# Altium PCB Drone_v1.0.PcbDoc
Units mm, origin at the board's own origin, x right, y up, seen from the top; angles counter-clockwise.
Board outline 99.06 x 99.27 mm, 2 copper layers (Top Layer, Bottom Layer); 71 components, 51 nets, 228 pads, 49 vias.
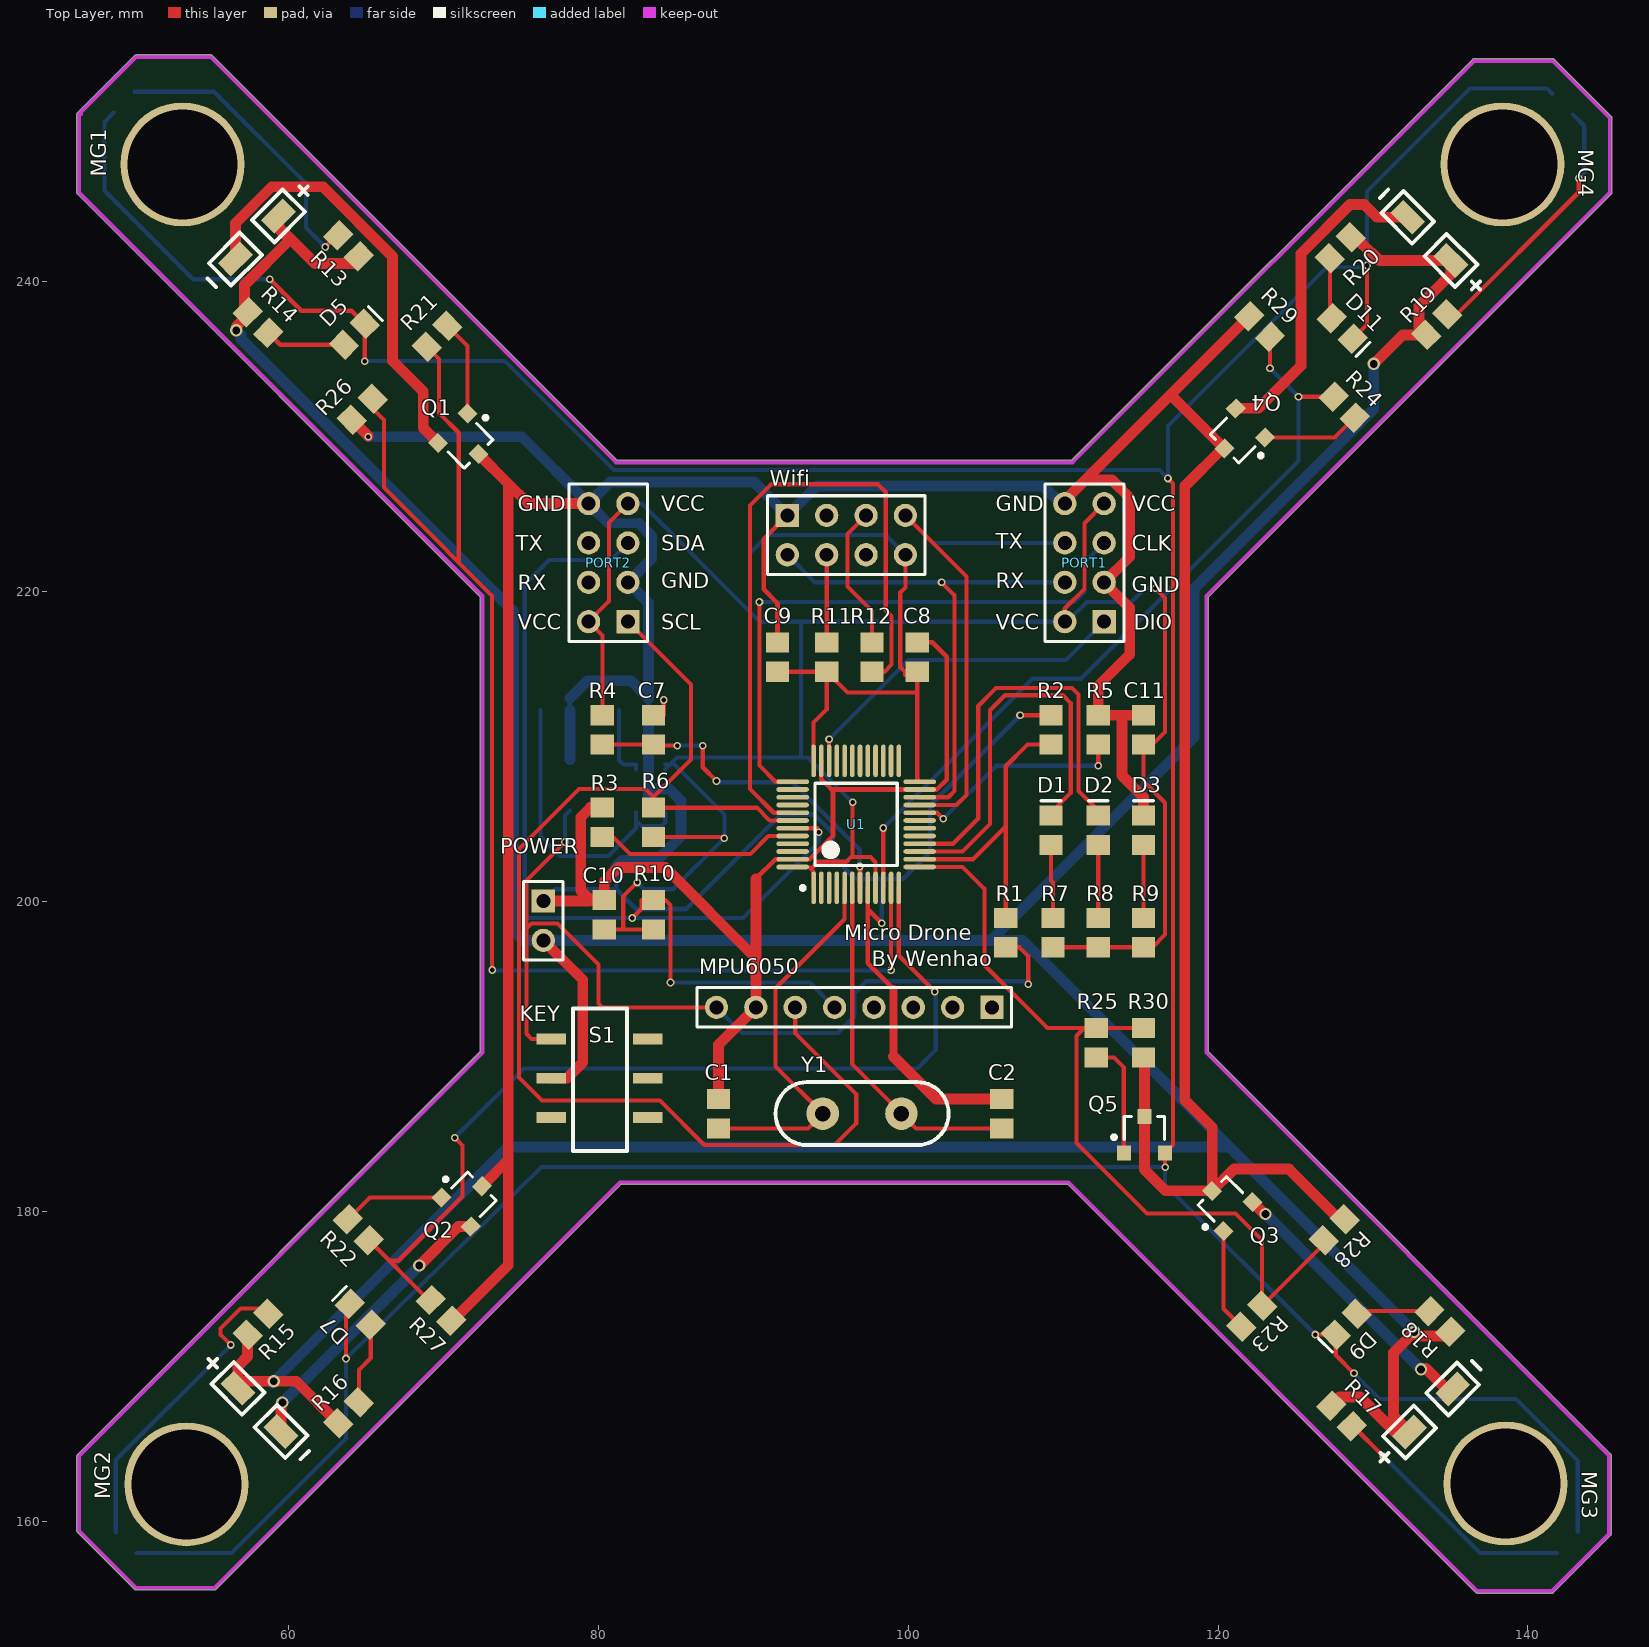
[diagram p0: Top Layer view]
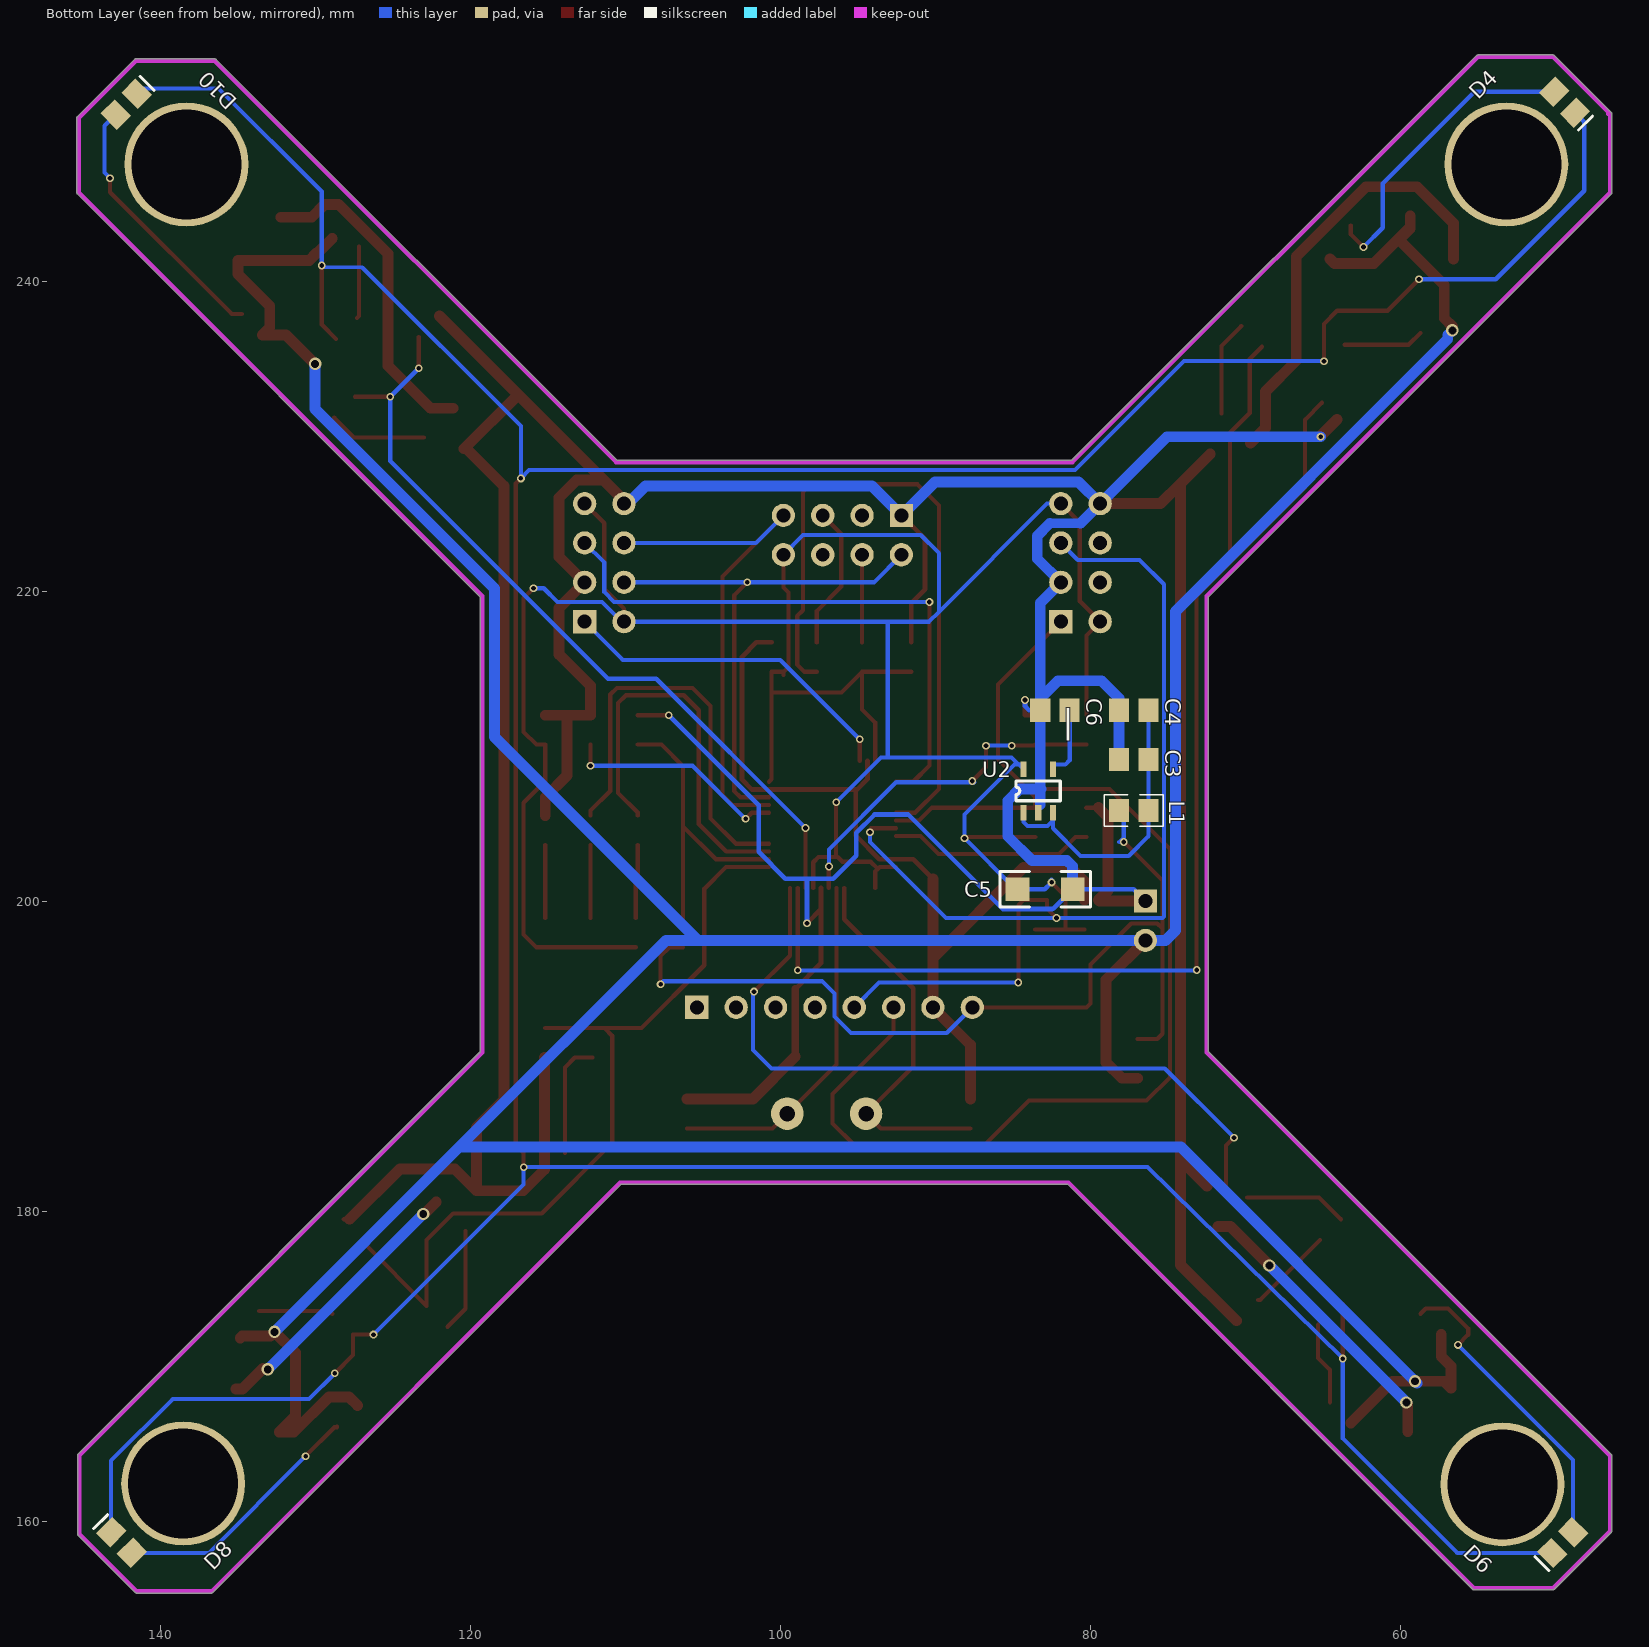
[diagram p1: Bottom Layer view, seen from below]

## Layer stack, top to bottom
Top Layer: signal copper 0.0356
Dielectric: dielectric 0.32, FR-4, Dk 4.8
Bottom Layer: signal copper 0.0356

## Board outline
50.075,155.612 46.392,159.295 46.392,159.294 cw(c46.482,159.385) 46.355,159.385 46.355,164.211 cw(c46.482,164.211) 46.392,164.302 46.392,164.301 72.39,190.299 72.39,219.657 46.392,245.655 46.392,245.654 cw(c46.482,245.745) 46.355,245.745 46.355,250.825 cw(c46.482,250.825) 46.392,250.916 46.392,250.915 50.075,254.598 50.074,254.598 cw(c50.165,254.508) 50.165,254.635 54.991,254.635 cw(c54.991,254.508) 55.082,254.598 55.081,254.598 81.206,228.473 110.564,228.473 136.435,254.344 136.434,254.344 cw(c136.525,254.254) 136.525,254.381 141.605,254.381 cw(c141.605,254.254) 141.696,254.344 141.695,254.344 145.378,250.661 145.378,250.662 cw(c145.288,250.571) 145.415,250.571 145.415,245.745 cw(c145.288,245.745) 145.378,245.654 145.378,245.655 119.38,219.657 119.38,190.299 145.332,164.347 145.331,164.348 cw(c145.242,164.257) 145.369,164.257 145.369,159.177 cw(c145.242,159.177) 145.331,159.087 145.332,159.087 141.649,155.404 141.649,155.405 cw(c141.559,155.494) 141.559,155.367 136.733,155.367 cw(c136.733,155.494) 136.635,155.413 cw(c136.716,155.512) 136.625,155.421 110.31,181.737 81.46,181.737 55.335,155.612 55.336,155.612 cw(c55.245,155.702) 55.245,155.575 50.165,155.575 cw(c50.165,155.702)

## Design rules (kind name [scope] priority, off if disabled: settings)
Clearance [All] p1: gap=0.2
PolygonConnect [All] p1: connectstyle=Relief reliefconductorwidth=0.254 reliefentries=4 polygonreliefangle="90 Angle" airgapwidth=0.254
RoutingVias [All] p1: holewidth=0.3 width=0.5 viastyle="Through Hole" minholewidth=0.3 minwidth=0.5 maxholewidth=0.3 maxwidth=0.5
SolderMaskExpansion [All] p1: expansion=0.102
Width [All] p1: maxlimit=0.8 minlimit=0.27 preferedwidth=0.27 minimp=50.000000 maximp=50.000000 favimp=50.000000
28 further rules are at their usual default settings.

## Components (designator, comment, footprint, x,y, rotation, side; value= is the part's Value field where it differs from the comment)
C1 "0402 12pF" 0805-2 87.757,186.309 r90 top
C2 "0402 12pF" 0805-2 106.045,186.309 r270 top
C3 "0402 12pF" 0805-2 77.216,209.169 r0 bottom
C4 "0402 12pF" 0805-2 77.216,212.344 r0 bottom
C5 "Cap Pol" 1206 82.931,200.787 r180 bottom
C6 "0402 12pF" 0805-2 82.296,212.344 r0 bottom
C7 "Cap" 0805-2 83.566,211.074 r90 top
C8 "Cap" 0805-2 100.584,215.773 r270 top
C9 "Cap" 0805-2 91.567,215.773 r270 top
C10 "Cap" 0805-2 80.391,199.136 r270 top
C11 "Cap" 0805-2 115.189,211.074 r270 top
D1 "LED0" LED_0805 109.22,204.597 r90 top
D2 "LED0" LED_0805 112.268,204.597 r90 top
D3 "LED0" LED_0805 115.189,204.597 r90 top
D4 "LED0" LED_0805 49.403,251.587 r225 bottom
D5 "LED0" LED_0805 64.262,236.601 r45 top
D6 "LED0" LED_0805 49.53,158.623 r315 bottom
D7 "LED0" LED_0805 64.643,173.355 r135 top
D8 "LED0" LED_0805 142.538,158.633 r45 bottom
D9 "LED0" LED_0805 128.27,172.72 r225 top
D10 "LED0" LED_0805 142.24,251.46 r135 bottom
D11 "LED0" LED_0805 128.016,236.982 r315 top
L1 "Inductor" 0805-1 77.216,205.867 r180 bottom
MG1 "MOTOR AC" Motor 53.975,246.761 r315 top
MG2 "MOTOR AC" Motor 54.229,163.195 r45 top
MG3 "MOTOR AC" Motor 137.749,163.241 r135 top
MG4 "MOTOR AC" Motor 137.541,246.761 r225 top
MPU6050 "MPU6050" HDR1X8 105.41,193.167 r180 top (schematic designator P1)
PORT1 "PORT" HDR2X4_CEN 112.649,218.059 r90 top
PORT2 "PORT" HDR2X4_CEN 81.915,218.059 r90 top
POWER "Header 2" HDR1X2 76.454,200.025 r270 top (schematic designator POWER1)
Q1 "MOSN" PCBComponent_1#1 71.374,229.87 r225 top
Q2 "MOSN" PCBComponent_1#1 71.501,180.721 r315 top
Q3 "MOSN" PCBComponent_1#1 120.523,180.34 r45 top
Q4 "MOSN" PCBComponent_1#1 121.412,230.124 r135 top
Q5 "MOSN" PCBComponent_1#1 115.189,184.785 r0 top
R1 "Res1" 0805-2 106.299,197.993 r270 top
R2 "Res1" 0805-2 109.22,211.074 r90 top
R3 "Res1" 0805-2 80.264,205.105 r270 top
R4 "Res1" 0805-2 80.264,211.074 r90 top
R5 "Res1" 0805-2 112.268,211.074 r270 top
R6 "Res1" 0805-2 83.566,205.105 r90 top
R7 "Res1" 0805-2 109.347,197.993 r270 top
R8 "Res1" 0805-2 112.268,197.993 r270 top
R9 "Res1" 0805-2 115.189,197.993 r270 top
R10 "Res1" 0805-2 83.566,199.136 r90 top
R11 "Res1" 0805-2 94.742,215.773 r270 top
R12 "Res1" 0805-2 97.663,215.773 r90 top
R13 "Res1" 0805-2 63.881,242.316 r135 top
R14 "Res1" 0805-2 58.039,237.363 r315 top
R15 "Res1" 0805-2 58.039,172.72 r45 top
R16 "Res1" 0805-2 63.881,167.005 r45 top
R17 "Res1" 0805-2 127.97,166.797 r315 top
R18 "Res1" 0805-2 134.32,172.893 r135 top
R19 "Res1" 0805-2 134.112,237.236 r45 top
R20 "Res1" 0805-2 127.889,242.189 r225 top
R21 "Res1" 0805-2 69.596,236.474 r225 top
R22 "Res1" 0805-2 64.516,178.816 r315 top
R23 "Res1" 0805-2 122.174,173.228 r45 top
R24 "Res1" 0805-2 128.143,231.902 r135 top
R25 "Res1" 0805-2 112.141,190.881 r90 top
R26 "Res1" 0805-2 64.77,231.775 r45 top
R27 "Res1" 0805-2 69.85,173.609 r135 top
R28 "Res1" 0805-2 127.508,178.816 r225 top
R29 "Res1" 0805-2 122.682,237.109 r315 top
R30 "Res1" 0805-2 115.189,190.881 r90 top
S1 "Switch" 开关 78.359,183.896 r0 top
U1 "STM32F103C" LQFP-48_M 96.647,204.978 r90 top
U2 "MIC5219" SOT25-5 84.328,205.74 r90 bottom
Wifi "ESP03" PCBComponent_1#2 92.202,222.377 r0 top (schematic designator Header1)
Y1 "Micro 3215" XTAL5 94.488,186.309 r0 top

## Footprints (in the part's own frame and the unit in brackets; to place one, negate y for a bottom-side part, rotate by r counter-clockwise, add the part's x,y. Pads: shape width x height; smd on the part's side, far side on the other; paste and mask are expansions set on the pad)
0805-1 [mm] "贴片带丝印"
  rect 1.3x1.5 smd: 1(-0.95,0) 2(0.95,0)
  silkscreen extent -1.91,-1.02 1.91,1.02, body extent -1.14,-0.51 1.14,0.51, height 1
0805-2 [mm] "贴片无丝印"
  rect 1.3x1.5 smd: 1(-0.95,0) 2(0.95,0)
1206 [mil] "贴片元件"
  rect 60x60 smd: 1(-70,0) 2(70,0)
  silkscreen extent -115,-45 115,45, body extent -75,-35 75,35, height 39
HDR1X2 [mm] "Connector; Header; 2 Position"
  rect 1.5x1.5 hole 0.9: 1(0,0)
  round 1.5 hole 0.9: 2(2.54,0)
  silkscreen extent -1.27,-1.27 3.81,1.27
HDR1X8 [mm] "Connector; Header; 8 Position"
  rect 1.5x1.5 hole 0.9: 1(0,0)
  round 1.5 hole 0.9: 2(2.54,0) 3(5.08,0) 4(7.62,0) 5(10.16,0) 6(12.7,0) 7(15.24,0) 8(17.78,0)
  silkscreen extent -1.27,-1.27 19.05,1.27
HDR2X4_CEN [mm] "Connector; Header; 4x2 Position"
  rect 1.5x1.5 hole 0.9: 1(0,0)
  round 1.5 hole 0.9: 2(2.54,0) 3(5.08,0) 4(7.62,0) 5(0,2.54) 6(2.54,2.54) 7(5.08,2.54) 8(7.62,2.54)
  silkscreen extent -1.27,-1.27 8.89,3.81
LED_0805 [mm] "贴片二极管"
  rect 1.3x1.5 smd: 1(-0.95,0) 2(0.95,0)
  silkscreen extent 1.91,-0.63 1.91,0.64
LQFP-48_M [mm] "Thin QFP, 48-Leads, Body 7x7mm, Pitch 0.5mm, IPC Low Density"
  oval 2.1x0.3 smd: 1(-4.1,2.75) 2(-4.1,2.25) 3(-4.1,1.75) 4(-4.1,1.25) 5(-4.1,0.75) 6(-4.1,0.25) 7(-4.1,-0.25) 8(-4.1,-0.75) 9(-4.1,-1.25) 10(-4.1,-1.75) 11(-4.1,-2.25) 12(-4.1,-2.75) 25(4.1,-2.75) 26(4.1,-2.25) 27(4.1,-1.75) 28(4.1,-1.25) 29(4.1,-0.75) 30(4.1,-0.25) 31(4.1,0.25) 32(4.1,0.75) 33(4.1,1.25) 34(4.1,1.75) 35(4.1,2.25) 36(4.1,2.75)
  oval 0.3x2.1 smd: 13(-2.75,-4.1) 14(-2.25,-4.1) 15(-1.75,-4.1) 16(-1.25,-4.1) 17(-0.75,-4.1) 18(-0.25,-4.1) 19(0.25,-4.1) 20(0.75,-4.1) 21(1.25,-4.1) 22(1.75,-4.1) 23(2.25,-4.1) 24(2.75,-4.1) 37(2.75,4.1) 38(2.25,4.1) 39(1.75,4.1) 40(1.25,4.1) 41(0.75,4.1) 42(0.25,4.1) 43(-0.25,4.1) 44(-0.75,4.1) 45(-1.25,4.1) 46(-1.75,4.1) 47(-2.25,4.1) 48(-2.75,4.1)
  silkscreen extent -4.22,-2.65 2.65,3.57, body extent -3.5,-3.5 3.5,3.5, height 1.6
Motor [mm]
  round 8 hole 7.1: 0(-1.143,0)
  rect 1.2x2 smd: 1(5.588,2.032) 2(5.588,-1.905)
  silkscreen extent 4.57,-4.06 6.6,4.7
PCBComponent_1#1 [mm]
  rect 0.9x0.95 smd: 1(-1.27,-1.016) 2(1.397,-1.016) 3(0.061,1.334)
  silkscreen extent -2.03,-0.14 1.36,1.33
PCBComponent_1#2 [mm]
  rect 1.5x1.5 hole 0.9: 1(0,2.54)
  round 1.5 hole 0.9: 2(2.54,2.54) 3(5.08,2.54) 4(7.62,2.54) 5(7.62,0) 6(5.08,0) 7(2.54,0) 8(0,0)
  silkscreen extent -1.27,-1.27 8.89,3.81
SOT25-5 [mm]
  rect 1x0.4 smd: 1(0,0) 2(0,-0.95) 3(0,-1.9) 4(2.8,-1.9) 5(2.8,0)
  silkscreen extent 0.76,-2.38 2.03,0.48
XTAL5 [mm]
  round 2.1 hole 1: 1(0,0) 2(5.08,0)
  silkscreen extent -3.05,-2.03 8.13,2.03
开关 [mm]
  rect 1.9x0.7 smd: 1(-1.397,7.239) 2(-1.397,4.699) 3(-1.397,2.159) 4(4.826,7.239) 5(4.826,4.699) 6(4.826,2.159)
  silkscreen extent 0,0 3.5,9.2

## Part data
C1 C2 C3 C4 C6: library part Cap, "Capacitor"
C5: "极性电解电容"
C7 C8 C9 C10 C11: "无极性电容"
D1 D2 D3 D4 D5 D6 D7 D8 D9 D10 D11: "发光二极管"
L1: "电感"
MPU6050: library part "Header 8", "Header, 8-Pin"
PORT1 PORT2: library part "Header 4X2A", "Header, 4-Pin, Dual row"
POWER: "Header, 2-Pin"
Q1 Q2 Q3 Q4 Q5: library part SI2302
R1 R2 R3 R4 R5 R6 R7 R8 R9 R10 R11 R12 R13 R14 R15 R16 R17 R18 R19 R20 R21 R22 R23 R24 R25 R26 R27 R28 R29 R30: "贴片电阻"
S1: library part 双刀双柄开关
U1: "STM32单片机48引脚"
Wifi: library part Hearder
Y1: library part XTAL, "Crystal Oscillator"

## Via types
v1: diameter 0.5, hole 0.3, Top Layer to Bottom Layer, 41 vias
v2: diameter 0.8, hole 0.5, Top Layer to Bottom Layer, 8 vias

## Nets (pads, with @x,y where several pads share a name; then routed paths per layer and width w, separated by ;. In a path a pad name is that pad's centre, name@x,y a point inside that pad or via, vN(x,y) a via of type N, cw(c..) or ccw(c..) an arc to the next point about the centre after c; other vN are vias at no path point)
3V3: C5.1 C8.2 C9.2 C10.2 C11.2 PORT1.4 PORT1.5 PORT2.4 PORT2.5 R4.2 R6.1 R7.2 R8.2 R9.2 R10.1 R11.2 U1.1 U1.9 U1.24 U1.36 U1.48 U2.5 Wifi.5 | length 199.9
  Top Layer w0.27: R4.2 80.264,217.17 PORT2.5 80.697,219.381 80.697,224.461 PORT2.4 ; C10.2 82.787,198.186 R10.1 ; 81.609,198.186 81.609,200.329 v1(82.512,201.231) ; R6.1 88.072,204.155 v1(88.138,204.089) ; C9.2 93.142,214.823 R11.2 ; U1.48 93.599,202.228 93.726,202.101 ; U1.1 93.897,201.93 93.726,202.101 ; U1.36 93.897,211.55 94.742,212.395 R11.2 ; v1(96.418,206.4) 96.418,202.87 ; U1.9 97.897,202.534 97.561,202.87 96.418,202.87 ; 99.807,214.615 99.807,214.823 ; Wifi.5 99.822,220.269 99.492,219.939 99.492,215.138 99.807,214.823 ; 100.584,213.487 96.078,213.487 R11.2 ; U1.24 100.584,207.891 C8.2 99.807,214.823 ; R7.2 R8.2 R9.2 115.763,197.043 116.586,197.866 116.586,206.375 115.189,207.772 C11.2 115.763,210.124 116.586,210.947 116.586,219.583 v1(115.951,220.218) ; PORT1.5 110.109,218.897 111.379,220.167 111.379,224.409 PORT1.4 ; 93.726,202.101 94.189,202.565 96.01,202.565 96.315,202.87 96.418,202.87
  Bottom Layer w0.27: PORT2.4 82.804,225.679 89.789,218.694 ; v1@82.512,201.426 v1(82.512,201.231) 82.956,200.787 C5.1 ; U2.5 85.09,209.302 85.09,209.296 93.091,209.296 ; U2.5@84.328,208.839 84.912,208.839 88.138,205.613 v1(88.138,204.089) C5.1@84.836,200.787 ; v1(96.418,206.4) 93.523,209.296 93.091,209.296 ; Wifi.5 98.552,223.647 90.957,223.647 89.789,222.479 89.789,218.694 ; v1(115.951,220.218) 115.291,220.218 114.402,219.329 111.531,219.329 110.261,218.059 PORT1.5 93.218,218.059 ; 89.789,218.694 90.424,218.059 93.218,218.059 ; 93.091,209.296 93.091,217.932 93.218,218.059
BAT: MG1.1 MG2.1 MG3.1 MG4.1 POWER.2 R13.1 R14.1 R15.1 R16.1 R17.1 R18.1 R19.1 R20.1 S1.2 | length 302.3
  Top Layer w0.7: v2(56.642,236.855) 56.642,237.109 57.171,237.638 57.171,239.797 60.085,242.711 59.363,243.434 MG1.1 59.363,243.532 61.722,241.173 64.262,241.173 R13.1@64.553,241.464 ; R15.1 57.367,170.626 56.743,170.002 MG2.1 57.197,169.037 60.506,169.037 R16.1 ; POWER.2 78.994,194.945 78.994,189.611 77.978,188.595 S1.2 ; R17.1 127.85,168.021 129.154,168.021 131.42,165.756 MG3.1 131.318,166.798 131.318,170.875 v2(132.664,172.221) 132.928,171.958 134.747,171.958 R18.1@134.874,171.831 ; R20.1@128.942,242.787 129.883,241.846 129.948,241.846 130.421,241.373 MG4.1 135.027,240.487 132.969,238.43 132.969,237.036 R19.1 131.916,236.564 v2(130.048,234.696)
  Bottom Layer w0.7: v2(56.642,236.855) 56.947,236.55 56.947,236.296 74.524,218.719 74.524,198.12 75.159,197.485 POWER.2 105.334,197.485 ; v2@58.928,168.91 74.168,184.15 120.736,184.15 ; v2(130.048,234.696) 130.048,231.775 118.466,220.193 118.466,210.617 105.334,197.485 ; v2(132.664,172.221) 120.736,184.15 ; 105.334,197.485 107.401,197.485 120.736,184.15
  other v2: 59.055,169.037
GND: C1.2 C2.1 C3.2 C4.2 C5.2 C6.2 C7.2 C8.1 C9.1 C10.1 C11.1 D3.2 MPU6050.7 PORT1.2 PORT1.8 PORT2.2 PORT2.8 POWER.1 Q1.3 Q2.3 Q3.3 Q4.3 Q5.3 R2.2 R3.1 R5.1 R26.1 R27.1 R28.1 R29.1 R30.1 U1.8 U1.23 U1.35 U1.47 U2.2 Wifi.1 | length 435.3
  Top Layer w0.27: U1.47 93.635,202.728 95.148,204.241
  Top Layer w0.3: v1@65.024,229.997 v1(65.151,229.997) v1@65.151,230.051 ; R27.1 R27.1@70.587,172.937 ; Q2.3@72.466,181.621 Q2.3 ; 79.487,206.055 R3.1 ; C7.2 84.226,212.024 v1(84.226,213.004) ; 90.17,201.458 91.44,202.728 U1.47 ; C9.1 91.567,219.253 90.678,220.142 90.678,223.393 Wifi.1 ; U1.35 94.397,207.888 95.057,207.228 ; 95.148,204.241 95.148,207.137 95.057,207.228 ; U1.8 97.397,199.492 ; v1(98.298,198.591) 97.397,199.492 ; 99.06,194.349 97.397,196.012 97.397,199.492 ; C8.1 101.563,216.723 102.489,215.797 102.489,207.863 101.854,207.228 U1.23 95.057,207.228 ; v1(107.224,212.024) R2.2 ; 117.856,226.822 117.867,226.822 ; R28.1@127.815,179.488 R28.1
  Top Layer w0.5: 99.06,189.992 99.06,194.349
  Top Layer w0.7: R26.1 v1@65.151,230.051 ; R27.1@70.587,172.937 74.193,176.544 74.193,183.327 ; Q1.3 74.193,226.964 ; Q2.3 74.193,183.327 ; POWER.1 79.431,200.025 ; PORT2.8 75.479,225.679 74.193,226.964 ; 79.487,206.055 78.867,205.435 78.867,200.711 79.492,200.086 ; C10.1 80.391,201.295 81.28,202.184 84.328,202.184 90.17,196.342 ; C1.2 87.757,190.754 MPU6050.7 90.17,201.458 ; 99.06,189.992 101.793,187.259 C2.1 ; PORT1.8 110.109,225.879 R29.1 ; 111.633,227.203 113.157,227.203 114.3,226.06 114.3,222.25 PORT1.2 114.3,218.948 114.3,215.951 112.268,213.919 R5.1 113.716,212.024 C11.1 ; 113.792,212.024 113.792,208.128 115.189,206.731 D3.2 ; R30.1@115.25,189.931 Q5.3 115.25,182.692 116.616,181.326 Q3.3 ; 116.985,232.664 Q4.3 ; 117.856,226.822 117.856,187.187 119.623,185.42 Q3.3 ; 117.867,226.822 Q4.3@120.269,229.224 ; R28.1@127.815,179.488 124.569,182.735 121.031,182.735 Q3.3 ; 74.193,183.327 74.193,226.964
  Bottom Layer w0.3: POWER.1 77.216,200.787 C5.2 ; C4.2 78.166,213.116 ; 81.153,201.574 C5.2 ; 83.246,213.106 C6.2 83.972,212.344 84.226,212.598 v1(84.226,213.004) ; v1(98.298,198.591) 98.298,201.473 ; v1(107.224,212.024) 101.422,206.223 101.422,203.2 99.695,201.473 98.298,201.473 ; PORT1.8@109.855,225.679 PORT1.8 ; C5.2 82.407,199.533 82.443,199.533 82.459,199.517 85.674,199.517 91.77,205.613 93.94,205.613 95.123,204.43 95.123,202.946 96.596,201.473 98.298,201.473
  Bottom Layer w0.6: 80.645,224.409 82.626,224.409
  Bottom Layer w0.7: v1(65.151,229.997) 75.057,229.997 PORT2.8 ; C3.2 C4.2 ; 78.166,213.116 79.299,214.249 82.103,214.249 83.246,213.106 83.246,219.268 PORT2.2 83.439,222.123 83.439,223.596 82.626,224.409 ; 80.645,224.409 PORT2.8 ; 81.152,201.574 81.152,202.271 81.534,202.653 83.781,202.653 85.344,204.216 85.344,206.502 84.582,207.264 83.185,207.264 ; 83.246,206.248 C6.2 ; PORT1.8@109.855,225.679 108.712,226.822 94.107,226.822 Wifi.1 90.043,227.076 80.772,227.076 PORT2.8
KEY: R12.1 U1.41 | length 44
  Top Layer w0.27: U1.41 91.325,205.728 89.789,207.264 89.789,225.552 91.161,226.924 98.044,226.924 98.552,226.416 98.552,218.796 98.933,218.415 98.933,215.29 98.466,214.823 R12.1
LED1: D1.2 U1.15 | length 26.2
  Top Layer w0.27: U1.15 103.508,203.228 105.283,205.003 105.283,212.344 106.251,213.312 109.982,213.312 110.49,212.804 110.49,207.01 109.22,205.74 D1.2
LED2: D2.2 U1.16 | length 27.2
  Top Layer w0.27: U1.16 102.89,203.728 104.521,205.359 104.521,212.623 105.679,213.782 110.569,213.782 110.998,213.353 110.998,207.137 112.268,205.867 D2.2
LED_EN: U1.45
NetC3_1: C3.1 C4.1 L1.2 U2.1 U2.3 | length 19.6
  Bottom Layer w0.27: C4.1 C3.1 L1.2 76.266,204.216 77.536,202.946 80.645,202.946 82.428,204.729 U2.3@82.428,205.461 ; U2.3 U2.3@82.428,205.461 ; U2.1 84.328,205.13 84.074,204.876 82.784,204.876 82.428,205.232 U2.3@82.428,205.461
NetC6_1: C6.1 U2.4 | length 4.7
  Bottom Layer w0.27: C6.1 81.346,209.118 81.625,208.839 82.428,208.839 U2.4
NetD1_1: D1.1 R7.1 | length 4.8
  Top Layer w0.27: D1.1 109.22,201.346 109.347,201.219 R7.1
NetD2_1: D2.1 R8.1 | length 4.7
  Top Layer w0.27: R8.1 D2.1
NetD3_1: D3.1 R9.1 | length 4.7
  Top Layer w0.27: R9.1 D3.1
NetD4_1: D4.1 R13.2 | length 19.8
  Top Layer w0.27: v1(62.382,242.24) 63.209,243.067 R13.2@63.209,243.623
  Bottom Layer w0.27: D4.1 55.208,252.259 61.138,246.329 61.138,243.484 v1(62.382,242.24)
NetD4_2: D4.2 D5.2 D6.2 D7.2 D8.2 D9.2 D10.2 D11.2 Q5.2 | length 296.7
  Top Layer w0.27: v1(58.801,240.157) 60.833,238.125 64.082,238.125 D5.2 v1(64.934,234.874) ; v1(63.717,170.499) D7.2@63.717,174.027 ; v1(116.586,182.855) Q5.2 117.094,184.277 117.094,226.974 v1(116.764,227.305) ; v1(126.275,172.048) D9.2 127.598,170.725 v1(128.778,169.545) ; D11.2 129.616,237.239 v1(129.616,241.046)
  Bottom Layer w0.27: D4.2 48.133,250.317 48.133,245.872 53.848,240.157 v1(58.801,240.157) ; D6.2 56.326,157.951 63.717,165.343 v1(63.717,170.499) 76.327,182.855 v1(116.586,182.855) 116.586,181.737 v1(126.275,172.048) ; v1(64.934,234.874) 73.972,234.874 81.008,227.838 116.23,227.838 v1(116.764,227.305) 116.764,230.683 127,240.919 v1@129.617,240.949 ; v1(128.778,169.545) 130.429,167.894 139.227,167.894 143.21,163.91 D8.2 ; v1(129.616,241.046) 129.616,245.821 136.271,252.476 141.224,252.476 D10.2
NetD5_1: D5.1 R14.2 | length 5.2
  Top Layer w0.27: R14.2 59.473,235.929 D5.1
NetD6_1: D6.1 R15.2 | length 20.3
  Top Layer w0.27: v1(56.286,171.383) 55.626,172.043 55.626,172.441 56.921,173.736 58.366,173.736 R15.2
  Bottom Layer w0.27: D6.1 48.858,163.955 v1(56.286,171.383)
NetD7_1: D7.1 R16.2 | length 5.3
  Top Layer w0.27: R16.2 64.553,169.774 65.315,170.536 D7.1
NetD8_1: D8.1 R17.2 | length 16.6
  Top Layer w0.27: R17.2 128.642,166.065 128.794,166.065 v1(130.658,164.202)
  Bottom Layer w0.27: v1(130.658,164.202) 136.898,157.961 D8.1
NetD9_1: D9.1 R18.2 | length 4.8
  Top Layer w0.27: D9.1 129.115,173.565 R18.2
NetD10_1: D10.1 R19.2 | length 17.2
  Top Layer w0.27: R19.2 135.419,237.908 143.281,245.77 v1(143.281,246.685)
  Bottom Layer w0.27: D10.1 143.637,250.063 143.637,247.04 v1(143.281,246.685)
NetD11_1: D11.1 R20.2 | length 4.7
  Top Layer w0.27: R20.2@127.217,242.279 127.217,237.781 D11.1
NetHeader1_3: R12.2 Wifi.3 | length 9.3
  Top Layer w0.27: Wifi.3 96.088,223.723 96.088,220.32 97.663,218.745 R12.2
NetHeader1_7: R11.1 Wifi.7 | length 5.7
  Top Layer w0.27: R11.1 Wifi.7
NetMG1_2: MG1.2 Q1.2 | length 28.5
  Top Layer w0.7: MG1.2 56.579,243.777 58.928,246.126 62.23,246.126 66.726,241.63 66.726,234.899 68.707,232.918 68.707,230.561 Q1.2
NetMG2_2: MG2.2 Q2.2 | length 18.8
  Top Layer w0.27: v2@59.527,167.579 v2(59.614,167.665)
  Top Layer w0.7: MG2.2 v2@59.527,167.579 ; v2(68.453,176.505) 70.963,179.015 Q2.2
  Bottom Layer w0.7: v2(59.614,167.665) v2(68.453,176.505)
NetMG3_2: MG3.2 Q3.2 | length 17.6
  Top Layer w0.7: Q3.2 v2@123.035,179.804 ; v2@133.413,169.862 134.736,168.54 MG3.2
  Bottom Layer w0.7: v2@123.038,179.857 v2(133.096,169.799)
  other v2: 123.063,179.832
NetMG4_2: MG4.2 Q4.2 | length 21.1
  Top Layer w0.7: Q4.2 122.606,231.83 125.349,234.573 125.349,241.808 128.524,244.983 129.44,244.983 130.266,244.157 MG4.2
NetQ1_1: Q1.1 R21.1 | length 6.2
  Top Layer w0.27: R21.1 71.554,235.86 Q1.1
NetQ2_1: Q2.1 R22.1 | length 6.6
  Top Layer w0.27: R22.1 65.257,180.901 Q2.1
NetQ3_1: Q3.1 R23.1 | length 6.6
  Top Layer w0.27: Q3.1 120.343,173.715 R23.1
NetQ4_1: Q4.1 R24.1 | length 6.3
  Top Layer w0.27: Q4.1 127.529,229.944 R24.1
NetQ5_1: Q5.1 R25.1 | length 7.6
  Top Layer w0.27: R25.1 113.284,189.931 113.919,189.296 Q5.1
NetR1_1: R1.1 R2.1 U1.14 | length 19.7
  Top Layer w0.27: U1.14 104.176,202.728 106.299,204.851 ; R1.1 106.299,201.168 106.299,208.727 107.696,210.124 R2.1
NetR3_2: R3.2 U1.44 | length 13.2
  Top Layer w0.27: R3.2 80.96,204.155 82.042,203.073 89.814,203.073 90.969,204.228 U1.44
NetR5_2: R5.2 U1.20 | length 14.5
  Top Layer w0.27: U1.20 101.866,205.728 v1(102.26,205.334) ; v1(112.268,208.763) R5.2
  Bottom Layer w0.27: v1(102.26,205.334) 105.689,208.763 v1(112.268,208.763)
OSC1: C1.1 U1.5 Y1.1 | length 24.8
  Top Layer w0.27: C1.1 93.538,185.359 Y1.1 91.44,189.357 91.44,194.4 95.897,198.857 U1.5
OSC2: C2.2 U1.6 Y1.2 | length 22.8
  Top Layer w0.27: U1.6 96.397,189.48 Y1.2 100.518,185.359 C2.2
PWM1: R24.2 R29.2 U1.10 | length 51.5
  Top Layer w0.27: U1.10 v1(98.397,204.747) ; v1(123.354,234.417) R29.2 ; v1(125.197,232.574) R24.2
  Bottom Layer w0.27: v1(98.397,204.747) 108.026,214.376 111.15,214.376 125.197,228.422 v1(125.197,232.574) v1(123.354,234.417)
PWM2: R21.2 R26.2 U1.11 | length 85.7
  Top Layer w0.27: R26.2@65.061,232.193 66.167,231.086 66.167,226.713 67.328,225.552 73.152,219.728 v1(73.152,195.58) ; R21.2 69.723,235.004 69.723,231.521 70.993,230.251 70.993,221.996 ; v1(98.897,195.555) U1.11
  Bottom Layer w0.27: v1(73.152,195.58) 73.177,195.555 v1(98.897,195.555)
PWM3: R22.2 R27.2 U1.12 | length 60.7
  Top Layer w0.27: R22.2 69.051,174.281 R27.2 ; 66.516,176.816 67.088,176.816 71.247,180.975 71.247,184.252 v1(70.739,184.76) ; U1.12 99.397,196.5 v1(101.714,194.183)
  Bottom Layer w0.27: v1(70.739,184.76) 75.209,189.23 100.584,189.23 101.778,190.424 v1@101.778,194.005
PWM4: R23.2 R25.2 R28.2 R30.2 U1.13 | length 54
  Top Layer w0.27: U1.13 103.518,202.228 104.927,200.818 104.927,195.885 108.981,191.831 111.364,191.831 ; R30.2 R25.2 111.364,191.831 ; R28.2 126.836,177.89 R23.2 122.846,178.144 121.133,179.857 115.418,179.857 110.871,184.404 110.871,191.338 111.364,191.831
RST: C7.1 R4.1 U1.7 | length 22.8
  Top Layer w0.27: R4.1 C7.1 83.632,210.058 v1(85.09,210.058) ; v1(86.741,210.058) 86.741,208.661 v1(87.63,207.772) ; v1(96.876,202.26) v1@96.897,202.239
  Top Layer w0.3: U1.7 v1@96.897,202.239
  Bottom Layer w0.27: v1(85.09,210.058) v1(86.741,210.058) ; v1@87.503,207.696 92.543,207.696 96.876,203.363 v1(96.876,202.26)
SCL: MPU6050.6 PORT2.1 R6.2 U1.42 | length 82.5
  Top Layer w0.27: PORT2.1 85.979,213.995 85.979,209.169 83.566,206.756 ; U1.42 91.063,205.228 90.236,206.055 R6.2 83.566,206.756 ; MPU6050.6 92.71,191.516 96.647,187.579 96.647,185.674 95.25,184.277 86.843,184.277 83.972,187.147 76.378,187.147 74.879,188.646 74.879,203.378 78.765,207.264 83.058,207.264 83.566,206.756
SDA: MPU6050.5 PORT2.3 R10.2 U1.43 | length 73.7
  Top Layer w0.27: v1(82.194,198.933) 82.804,199.542 82.804,200.086 R10.2 84.328,200.086 84.658,199.756 v1(84.658,194.767) ; U1.43 94.158,204.724 94.154,204.728 U1.43
  Bottom Layer w0.27: PORT2.3 80.823,222.047 76.835,222.047 75.26,220.472 75.26,199.034 75.362,198.933 v1(82.194,198.933) 89.332,198.933 94.234,203.835 v1(94.234,204.47) ; v1(84.658,194.767) 93.65,194.767 MPU6050.5
SWCLK: PORT1.3 U1.37 | length 38.1
  Top Layer w0.27: v1(90.399,219.329) 90.399,208.769 91.44,207.728 U1.37
  Bottom Layer w0.27: v1(90.399,219.329) 110.744,219.329 111.379,219.964 111.379,221.869 PORT1.3
SWDIO: PORT1.1 U1.34 | length 22.3
  Top Layer w0.27: U1.34 v1(94.897,210.464)
  Bottom Layer w0.27: v1(94.897,210.464) 100.028,215.595 110.185,215.595 PORT1.1
USART1_RX: PORT2.6
USART1_TX: PORT2.7
USART3_RX: PORT1.6 U1.22 Wifi.8 | length 34.9
  Top Layer w0.27: U1.22 102.588,206.728 102.997,207.137 102.997,219.761 v1(102.159,220.599)
  Bottom Layer w0.27: Wifi.8 93.98,220.599 v1(102.159,220.599) PORT1.6
USART3_TX: PORT1.7 U1.21 Wifi.4 | length 34
  Top Layer w0.27: Wifi.4 103.759,220.98 103.759,206.883 103.104,206.228 U1.21
  Bottom Layer w0.27: Wifi.4 101.6,223.139 PORT1.7
VCC: L1.1 MPU6050.8 R1.2 S1.1 | length 60.2
  Top Layer w0.27: S1.1 75.692,191.135 75.362,191.465 75.362,198.247 ; v1(77.851,203.835) 75.362,201.346 75.362,198.247 ; MPU6050.8 80.264,193.167 80.01,193.421 80.01,195.936 77.368,198.577 75.692,198.577 75.362,198.247 ; R1.2 107.188,197.043 107.747,196.484 v1(107.747,194.666)
  Bottom Layer w0.27: 78.141,203.835 77.851,204.125 77.851,205.552 L1.1 ; MPU6050.8 89.281,191.516 95.453,191.516 96.52,192.583 96.52,194.056 97.322,194.858 107.554,194.858 v1(107.747,194.666)
pads on no net: MG1.0 MG2.0 MG3.0 MG4.0 MPU6050.1 MPU6050.2 MPU6050.3 MPU6050.4 S1.3 S1.4 S1.5 S1.6 U1.2 U1.3 U1.4 U1.17 U1.18 U1.19 U1.25 U1.26 U1.27 U1.28 U1.29 U1.30 U1.31 U1.32 U1.33 U1.38 U1.39 U1.40 U1.46 Wifi.2 Wifi.6

## Keep-outs
Keep-Out Layer:
  lines w0.254: 46.609,250.825 46.482,250.825 ; 136.716,155.512 110.363,181.864 81.407,181.864 55.245,155.702 50.165,155.702 46.482,159.385 46.482,164.211 72.517,190.246 72.517,219.71 46.482,245.745 46.482,250.825 ; 136.733,155.494 141.559,155.494 145.242,159.177 145.242,164.257 119.253,190.246 119.253,219.71 145.288,245.745 145.288,250.571 141.605,254.254 136.525,254.254 110.617,228.346 81.153,228.346 54.991,254.508 50.165,254.508 46.482,250.825

## Silkscreen, mask and mechanical layers (free items; w line width, h text height)
Top Overlay:
  text "GND" at 74.803,225.171 h1
  text "VCC" at 84.074,225.171 h1
  text "GND" at 105.664,225.171 h1
  text "VCC" at 114.427,225.171 h1
  text "TX" at 105.664,222.758 h1
  text "TX" at 74.676,222.631 h1
  text "SDA" at 84.074,222.631 h1
  text "CLK" at 114.427,222.631 h1
  text "GND" at 84.074,220.218 h1
  text "RX" at 105.664,220.218 h1
  text "RX" at 74.803,220.091 h1
  text "GND" at 114.427,219.964 h1
  text "VCC" at 74.803,217.551 h1
  text "SCL" at 84.074,217.551 h1
  text "VCC" at 105.664,217.551 h1
  text "DIO" at 114.554,217.551 h1
  text "Micro Drone" at 95.885,197.485 h1
  text "By Wenhao" at 97.663,195.834 h1
Bottom Overlay:
  text "|" at 81.788,211.963 h1.52 r180

## Text inside footprints (layer, text, board x,y; h text height)
S1: Top Overlay "KEY" at 74.93,192.278 h1